# Altium PCB BRK7360.PcbDoc (part 1 of 3)
Units mil, origin at the board's own origin, x right, y up, seen from the top; angles counter-clockwise.
Board outline 7086.61 x 3956.69 mil, 4 copper layers (L1-Top, L2-Plane-1, L3-Plane-2, L4-Bottom), stack 61.722 mil thick; 106 components, 276 nets, 968 pads, 441 vias.
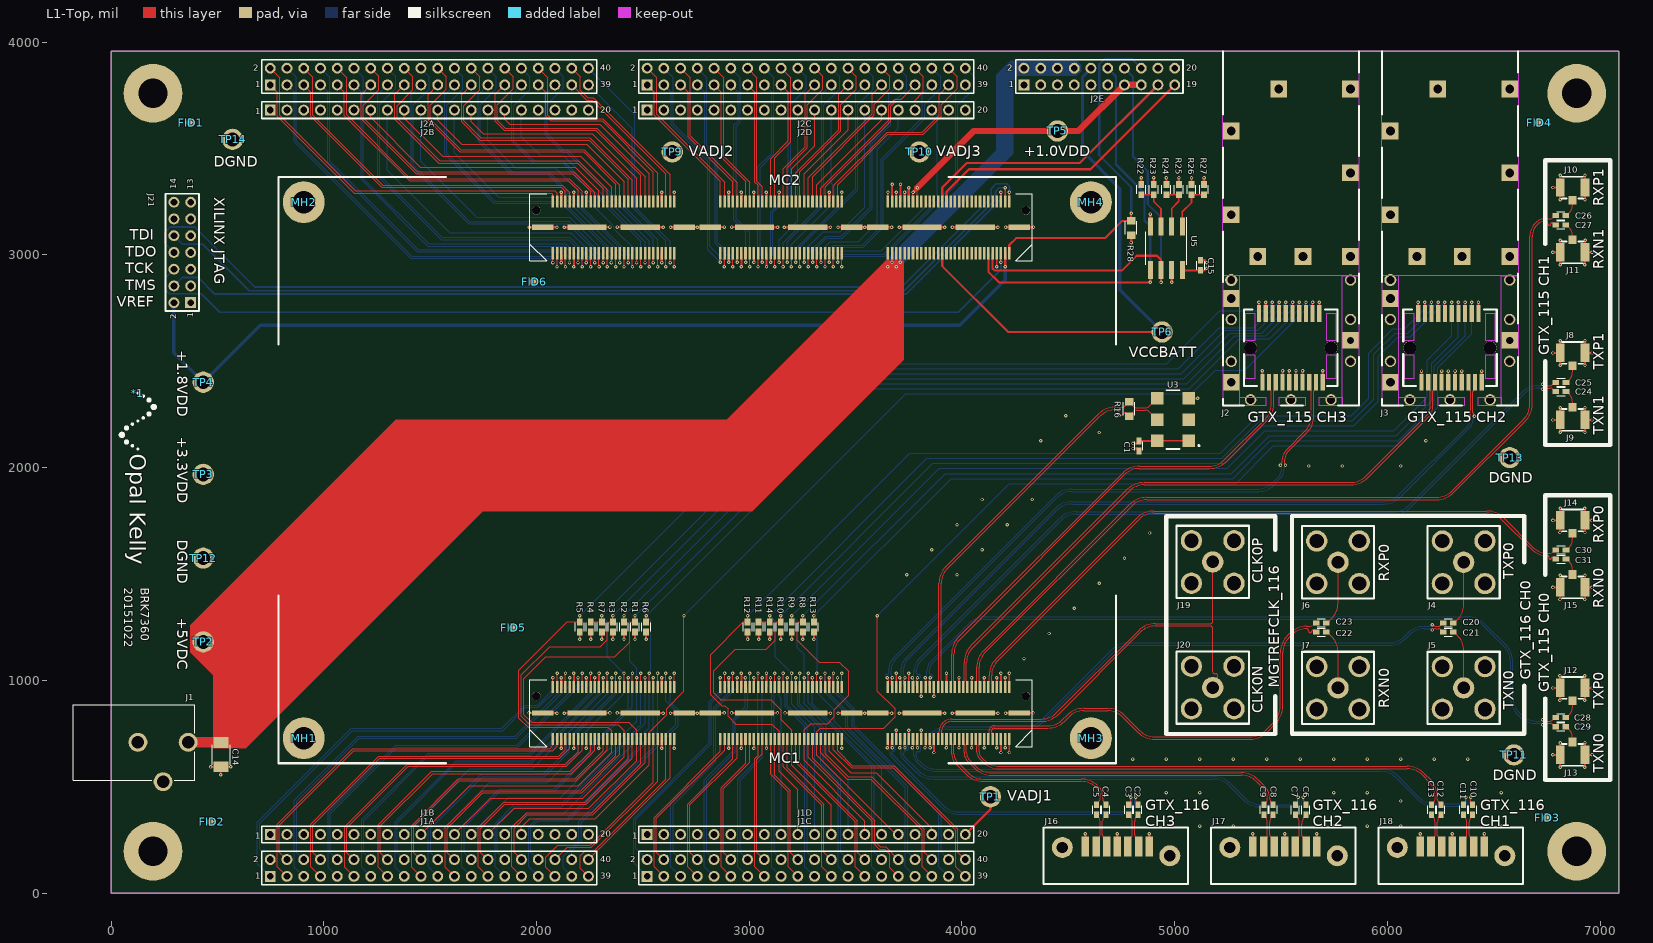
[diagram p0: L1-Top view]
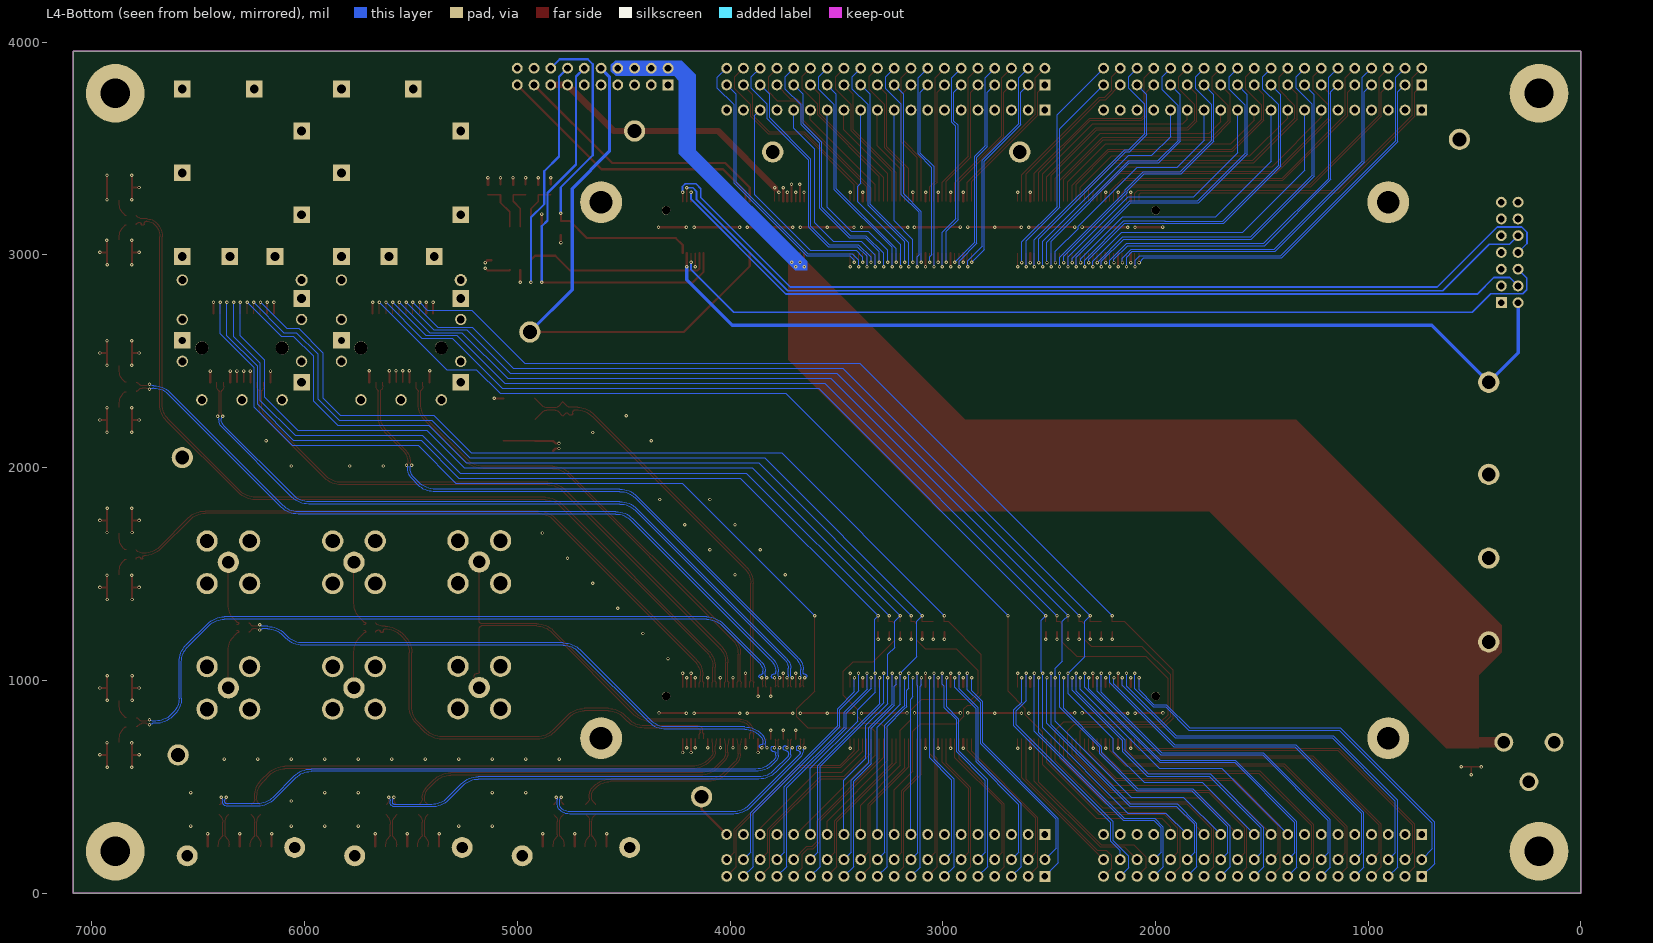
[diagram p1: L4-Bottom view, seen from below]
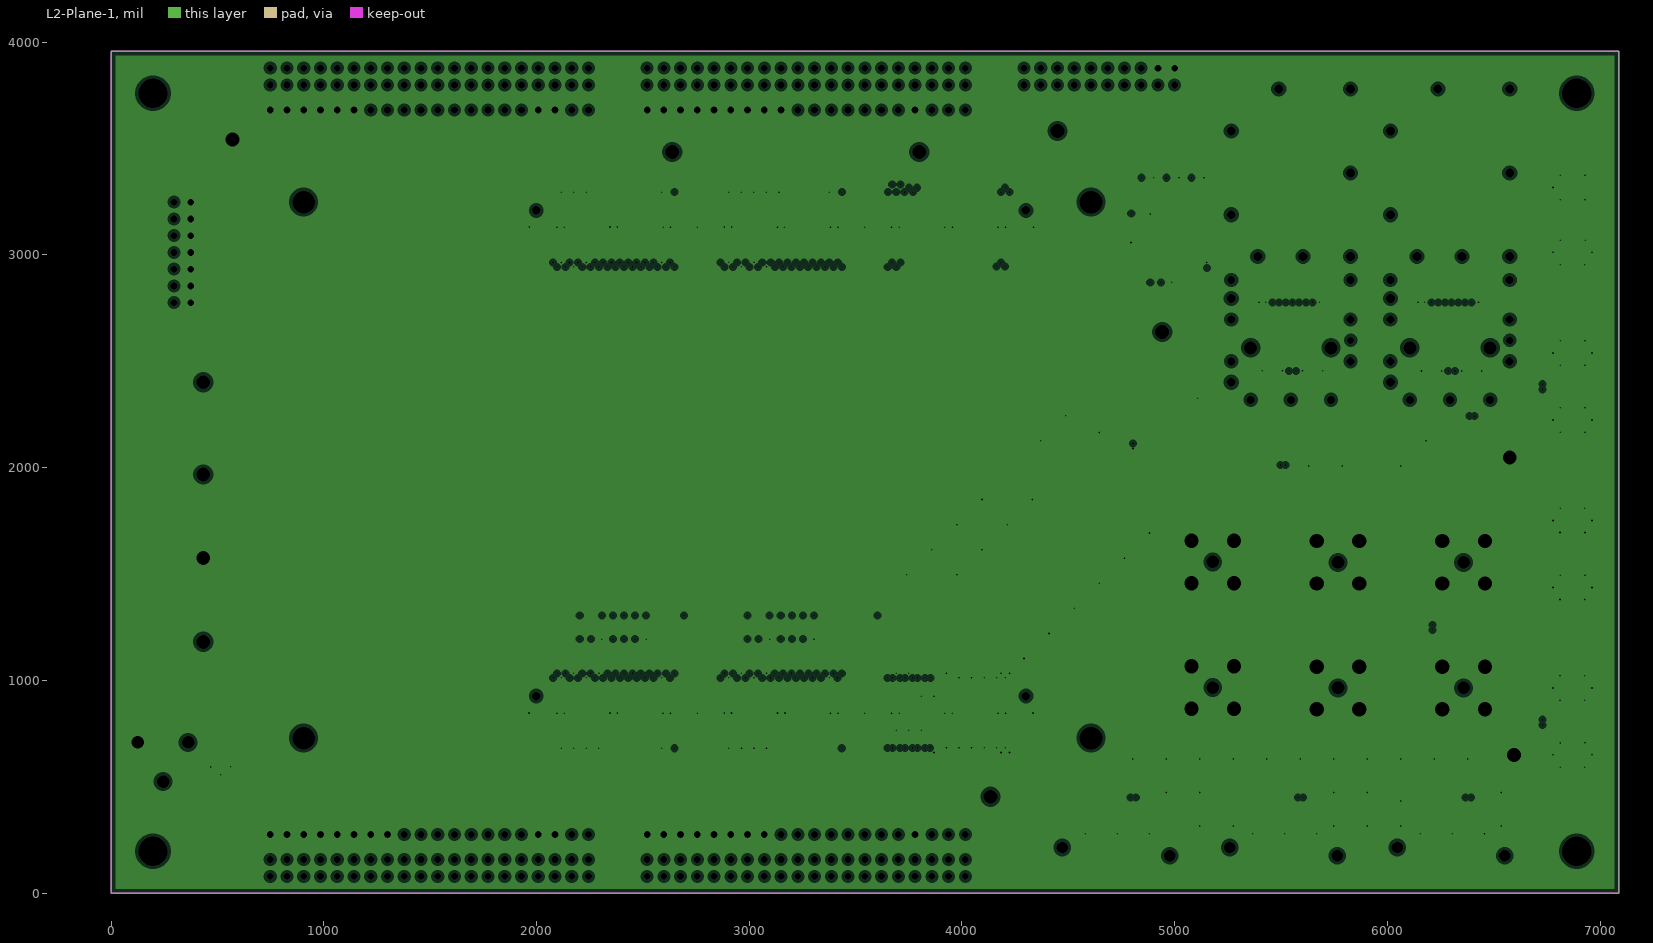
[diagram p2: L2-Plane-1, clearances drawn from the general rule]
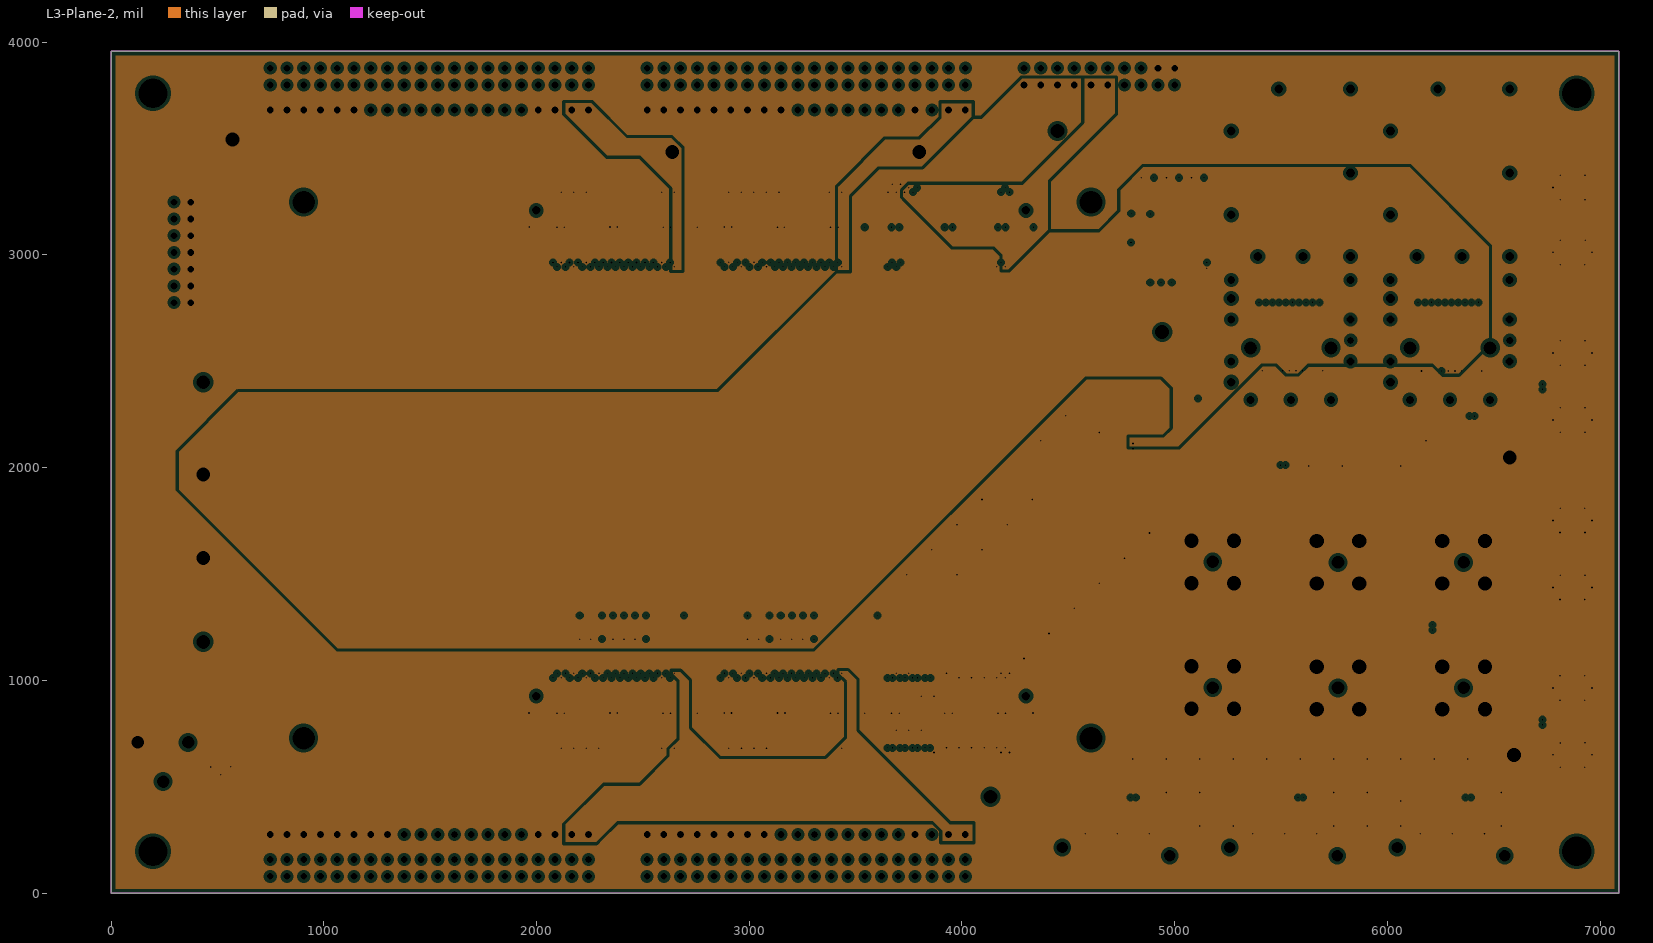
[diagram p3: L3-Plane-2, clearances drawn from the general rule]

## Layer stack, top to bottom
Top Solder: solder mask 0.4, Solder Resist, Dk 3.5
L1-Top: signal copper 1.95
Dielectric1: prepreg 2.268, FR-4, Dk 4.2
Dielectric 5: prepreg 2.268, FR-4, Dk 4.2
L2-Plane-1: plane copper 1.3, net DGND
Dielectric 4: core 14, Dk 4.2
Dielectric 6: core 6.05, Dk 4.2
Dielectric 7: core 6.05, Dk 4.2
Dielectric 8: core 6.05, Dk 4.2
Dielectric 9: core 14, Dk 4.2
L3-Plane-2: plane copper 1.3, net (Multiple Nets)
Dielectric3: prepreg 2.268, FR-4, Dk 4.2
Dielectric 10: prepreg 2.268, FR-4, Dk 4.2
L4-Bottom: signal copper 1.95
Bottom Solder: solder mask 0.4, Solder Resist, Dk 3.5

## Board outline
0,0 0,3956.69 7086.61,3956.69 7086.61,0

## Design rules (kind name [scope] priority, off if disabled: settings)
Clearance [All] p1: gap=5
DiffPairsRouting okxDiffRouting100ohm [All] p1: maxlimit=5.98 minlimit=5.98 mostfreqgap=5.98 toplayer_minwidth=5.24 toplayer_maxwidth=5.24 toplayer_prefwidth=5.24 bottomlayer_minwidth=5.24 bottomlayer_maxwidth=5.24 bottomlayer_prefwidth=5.24 maxuncoupledlength=500 // Differential pair spacing for all 100ohm diff routes based on NTI stackup.
FabricationTestPointUsage TestPointUsage [All] p1: valid=0 allowmultiple=FALSE
FabricationTestpoint Testpoint [All] p1: side=3 testpointundercomponent=TRUE minsize=40 maxsize=100 preferedsize=60 minholesize=0 maxholesize=40 preferedholesize=32 testpointgrid=1 allowsidetop=TRUE allowsidebottom=TRUE usegrid=TRUE gridtolerance=0.01
HoleSize [All] p1: absolutevalues=TRUE maxlimit=2160 minlimit=8 maxpercent=80.000 minpercent=20.000
MatchedLengths okMatchedMGTSFP1 [InDifferentialPairClass('okMGTDiffSFP1Match')] p1: tolerance=700 checknetsindiffpair=FALSE checkdiffpairvsdiffpair=TRUE checkothers=TRUE
MatchedLengths okMatchedMGTSFP0 [InDifferentialPairClass('okMGTDiffSFP0Match')] p2: tolerance=700 checknetsindiffpair=FALSE checkdiffpairvsdiffpair=TRUE checkothers=TRUE
MatchedLengths okMatchedMGTSATA2 [InDifferentialPairClass('okMGTDiffSATA2Match')] p3: tolerance=700 checknetsindiffpair=FALSE checkdiffpairvsdiffpair=TRUE checkothers=TRUE
MatchedLengths okMatchedMGTSATA1 [InDifferentialPairClass('okMGTDiffSATA1Match')] p4: tolerance=700 checknetsindiffpair=FALSE checkdiffpairvsdiffpair=TRUE checkothers=TRUE
MatchedLengths okMatchedMGTSATA0 [InDifferentialPairClass('okMGTDiffSATA0Match')] p5: tolerance=700 checknetsindiffpair=FALSE checkdiffpairvsdiffpair=TRUE checkothers=TRUE
MatchedLengths okMatchedMGTDiffPairs [InNetClass('okMGT')] p6: tolerance=5 checknetsindiffpair=TRUE checkdiffpairvsdiffpair=FALSE checkothers=FALSE
MatchedLengths okMatchedMGTRefClkDiffPairs [InNetClass('okMGTRefClk')] p7: tolerance=5 checknetsindiffpair=TRUE checkdiffpairvsdiffpair=FALSE checkothers=FALSE // Control skew within MGTREFCLKdiferential pairs.
MatchedLengths okMatchedMGTTX [InDifferentialPairClass('okMGTDiffTXMatch')] p8: tolerance=5000 checknetsindiffpair=TRUE checkdiffpairvsdiffpair=TRUE checkothers=TRUE
MatchedLengths okMatchedMGTRX [InDifferentialPairClass('okMGTDiffRXMatch')] p9: tolerance=5000 checknetsindiffpair=TRUE checkdiffpairvsdiffpair=TRUE checkothers=TRUE
PlaneClearance [All] p1: clearance=15
PlaneConnect [All] p1: planeconnectstyle=Direct reliefexpansion=20 reliefentries=4 reliefconductorwidth=10 reliefairgap=10
PolygonConnect "Via Connect" [IsVia] p1: connectstyle=Direct reliefconductorwidth=10 reliefentries=4 polygonreliefangle="90 Angle" airgapwidth=10
PolygonConnect [All] p2: connectstyle=Direct reliefconductorwidth=10 reliefentries=4 polygonreliefangle="90 Angle" airgapwidth=10
RoutingVias [All] p1: holewidth=8 width=16 viastyle="Through Hole" minholewidth=8 minwidth=16 maxholewidth=8 maxwidth=16
SilkToSolderMaskClearance SilkscreenOverComponentPads [IsPad] p1: minsilkscreentomaskgap=10 clearancetoexposedcopper=TRUE
SolderMaskExpansion [All] p1: expansion=4
Width [All] p1: maxlimit=50 minlimit=5 preferedwidth=10 minimp=50.000000 maximp=50.000000 favimp=50.000000
Width okxWidthDiff100ohm [(InDifferentialPairClass('All Differential Pairs'))] p2: maxlimit=9.5 minlimit=9.5 preferedwidth=9.5 minimp=50.000000 maximp=50.000000 favimp=50.000000 // 100 ohm differential pair routing based on 4 layer stackup from Saturn
Width okWidth50ohm [All] p3: maxlimit=40 minlimit=12 preferedwidth=12 minimp=50.000000 maximp=50.000000 favimp=50.000000 // 50 ohm SE routing based on 4 layer stackup from Saturn
23 further rules are at their usual default settings.

## Classes and differential pairs
component class Top: *1 FID1 FID2 FID3 FID4 FID5 FID6 MH1 MH2 MH3 MH4
component class MC2: C14 C15 J1 J2A J2B J2C J2D J2E J21 MC2 R22 R23 R24 R25 R26 R27 R28 TP2 TP3 TP4 TP5 TP6 TP9 TP10 TP11 TP12 TP13 TP14 U5
component class MC1: C1 C2 C3 C4 C5 C6 C7 C8 C9 C10 C11 C12 C13 C20 C21 C22 C23 C24 C25 C26 C27 C28 C29 C30 C31 J1A J1B J1C J1D J2 J3 J4 J5 J6 J7 J8 J9 J10 J11 J12 J13 J14 J15 J16 J17 J18 J19 J20 MC1 R1 R2 R3 R4 R5 R6 R7 R8 R9 R10 R11 R12 R13 R14 R16 TP1 U3
net class okMGTRefClk: GTX115_REFCLK0N GTX115_REFCLK0P GTX116_REFCLK0N GTX116_REFCLK0P
differential pair class okMGTDiffRXMatch: GTX115_RX0 GTX115_RX1 GTX115_RX2 GTX115_RX3 GTX116_RX0 GTX116_RX1 GTX116_RX2 GTX116_RX3
differential pair class okMGTDiffTXMatch: GTX115_TX0 GTX115_TX1 GTX115_TX2 GTX115_TX3 GTX116_TX0 GTX116_TX1 GTX116_TX2 GTX116_TX3
differential pair class okMGTDiffPairs: GTX115_REFCLK0 GTX115_RX0 GTX115_RX1 GTX115_RX2 GTX115_RX3 GTX115_TX0 GTX115_TX1 GTX115_TX2 GTX115_TX3 GTX116_REFCLK0 GTX116_RX0 GTX116_RX1 GTX116_RX1_C GTX116_RX2 GTX116_RX2_C GTX116_RX3 GTX116_RX3_C GTX116_TX0 GTX116_TX1 GTX116_TX1_C GTX116_TX2 GTX116_TX2_C GTX116_TX3 GTX116_TX3_C
net class okMGT: GTX115_REFCLK0N GTX115_REFCLK0P GTX115_RXN0 GTX115_RXN1 GTX115_RXN2 GTX115_RXN3 GTX115_RXP0 GTX115_RXP1 GTX115_RXP2 GTX115_RXP3 GTX115_TXN0 GTX115_TXN1 GTX115_TXN2 GTX115_TXN3 GTX115_TXP0 GTX115_TXP1 GTX115_TXP2 GTX115_TXP3 GTX116_REFCLK0N GTX116_REFCLK0P GTX116_RXN0 GTX116_RXN1 GTX116_RXN1_C GTX116_RXN2 GTX116_RXN2_C GTX116_RXN3 GTX116_RXN3_C GTX116_RXP0 GTX116_RXP1 GTX116_RXP1_C GTX116_RXP2 GTX116_RXP2_C GTX116_RXP3 GTX116_RXP3_C GTX116_TXN0 GTX116_TXN1 GTX116_TXN1_C GTX116_TXN2 GTX116_TXN2_C GTX116_TXN3 GTX116_TXN3_C GTX116_TXP0 GTX116_TXP1 GTX116_TXP1_C GTX116_TXP2 GTX116_TXP2_C GTX116_TXP3 GTX116_TXP3_C
differential pair class okMGTDiffSFP0Match: GTX115_RX3 GTX115_TX3
differential pair class okMGTDiffSFP1Match: GTX115_RX2 GTX115_TX2
differential pair class okMGTDiffSATA0Match: GTX116_RX1 GTX116_TX1
differential pair class okMGTDiffSATA1Match: GTX116_RX2 GTX116_TX2
differential pair class okMGTDiffSATA2Match: GTX116_RX3 GTX116_TX3
differential pair GTX116_TX3_C: +GTX116_TXP3_C -GTX116_TXN3_C
differential pair GTX116_TX2_C: +GTX116_TXP2_C -GTX116_TXN2_C
differential pair GTX116_TX1_C: +GTX116_TXP1_C -GTX116_TXN1_C
differential pair GTX116_RX3_C: +GTX116_RXP3_C -GTX116_RXN3_C
differential pair GTX116_RX2_C: +GTX116_RXP2_C -GTX116_RXN2_C
differential pair GTX116_RX1_C: +GTX116_RXP1_C -GTX116_RXN1_C
differential pair GTX116_TX3: +GTX116_TXP3 -GTX116_TXN3
differential pair GTX116_TX2: +GTX116_TXP2 -GTX116_TXN2
differential pair GTX116_TX1: +GTX116_TXP1 -GTX116_TXN1
differential pair GTX116_TX0: +GTX116_TXP0 -GTX116_TXN0
differential pair GTX116_RX3: +GTX116_RXP3 -GTX116_RXN3
differential pair GTX116_RX2: +GTX116_RXP2 -GTX116_RXN2
differential pair GTX116_RX1: +GTX116_RXP1 -GTX116_RXN1
differential pair GTX116_RX0: +GTX116_RXP0 -GTX116_RXN0
differential pair GTX115_TX3: +GTX115_TXP3 -GTX115_TXN3
differential pair GTX115_TX2: +GTX115_TXP2 -GTX115_TXN2
differential pair GTX115_TX1: +GTX115_TXP1 -GTX115_TXN1
differential pair GTX115_TX0: +GTX115_TXP0 -GTX115_TXN0
differential pair GTX115_RX3: +GTX115_RXP3 -GTX115_RXN3
differential pair GTX115_RX2: +GTX115_RXP2 -GTX115_RXN2
differential pair GTX115_RX1: +GTX115_RXP1 -GTX115_RXN1
differential pair GTX115_RX0: +GTX115_RXP0 -GTX115_RXN0
differential pair GTX115_REFCLK0: +GTX115_REFCLK0P -GTX115_REFCLK0N
differential pair GTX116_REFCLK0: +GTX116_REFCLK0P -GTX116_REFCLK0N

## Components (designator, comment, footprint, x,y, rotation, side; value= is the part's Value field where it differs from the comment)
*1 "Opal Kelly Logo" okLogo-23x5 125.6,2350.8 r270 top
C1 "C0402C103K4RACTU" CAPC1005N 4832,2102 r90 top
C2 "C0402C104K8PACTU" CAPC1005N 4827,392 r90 top
C3 "C0402C104K8PACTU" CAPC1005N 4784,392 r90 top
C4 "C0402C104K8PACTU" CAPC1005N 4676,392 r90 top
C5 "C0402C104K8PACTU" CAPC1005N 4633,392 r90 top
C6 "C0402C104K8PACTU" CAPC1005N 5617,391.38 r90 top
C7 "C0402C104K8PACTU" CAPC1005N 5567,391.38 r90 top
C8 "C0402C104K8PACTU" CAPC1005N 5463,392 r90 top
C9 "C0402C104K8PACTU" CAPC1005N 5420,392 r90 top
C10 "C0402C104K8PACTU" CAPC1005N 6401,392 r90 top
C11 "C0402C104K8PACTU" CAPC1005N 6358,392 r90 top
C12 "C0402C104K8PACTU" CAPC1005N 6251,392 r90 top
C13 "C0402C104K8PACTU" CAPC1005N 6208,392 r90 top
C14 "JMK316BJ476ML-T" CAPC3216N 516,651 r270 top
C15 "C0402C104K8PACTU" CAPC1005N 5122,2951 r90 top
C20 "C0402C104K8PACTU" CAPC1005N 6286,1270 r180 top
C21 "C0402C104K8PACTU" CAPC1005N 6286,1227 r180 top
C22 "C0402C104K8PACTU" CAPC1005N 5688.98,1270 r180 top
C23 "C0402C104K8PACTU" CAPC1005N 5688.98,1227 r180 top
C24 "C0402C104K8PACTU" CAPC1005N 6815.62,2401 r180 top
C25 "C0402C104K8PACTU" CAPC1005N 6815.62,2358 r180 top
C26 "C0402C104K8PACTU" CAPC1005N 6814.96,3185.04 r180 top
C27 "C0402C104K8PACTU" CAPC1005N 6814.96,3141.73 r180 top
C28 "C0402C104K8PACTU" CAPC1005N 6815,825 r180 top
C29 "C0402C104K8PACTU" CAPC1005N 6815,782 r180 top
C30 "C0402C104K8PACTU" CAPC1005N 6815.62,1613 r180 top
C31 "C0402C104K8PACTU" CAPC1005N 6815.62,1570 r180 top
FID1 "FIDUCIAL" FID1MM/2MM-SS 374.02,3622.05 r90 top
FID2 "FIDUCIAL" FID1MM/2MM-SS 472.44,334.65 r90 top
FID3 "FIDUCIAL" FID1MM/2MM-SS 6751.97,354.33 r90 top
FID4 "FIDUCIAL" FID1MM/2MM-SS 6712.6,3622.05 r90 top
FID5 "FIDUCIAL" FID1MM/2MM-SS 1891,1247 r90 top
FID6 "FIDUCIAL" FID1MM/2MM-SS 1988.19,2874.02 r90 top
J1 "PJ-102AH" CUI-PJ102A -177.17,708.66 r270 top
J1A "0877584016" HDR2X20-2MM 1496.06,118.11 r0 top
J1B "Header, 20-Pin, Single Row" HDR1X20-2MM 1496.06,275.59 r0 top
J1C "0877584016" HDR2X20-2MM 3267.72,118.11 r0 top
J1D "Header, 20-Pin, Single Row" HDR1X20-2MM 3267.72,275.59 r0 top
J2 "UE75-A20-6000T" SFP_RCPT_20_CAGE 5826.77,2598.43 r270 top locked
J2A "0877584016" HDR2X20-2MM 1496.06,3838.58 r0 top
J2B "Header, 20-Pin, Single Row" HDR1X20-2MM 1496.06,3681.1 r0 top
J2C "0877584016" HDR2X20-2MM 3267.72,3838.58 r0 top
J2D "Header, 20-Pin, Single Row" HDR1X20-2MM 3267.72,3681.1 r0 top
J2E "0877582016" HDR2X10-2MM 4645.67,3838.58 r0 top
J3 "UE75-A20-6000T" SFP_RCPT_20_CAGE 6574.8,2598.43 r270 top locked
J4 "TXP0" SMA 6358.27,1555.12 r270 top locked
J5 "TXN0" SMA 6358.27,964.57 r270 top locked
J6 "RXP0" SMA 5767.72,1555.12 r270 top locked
J7 "RXN0" SMA 5767.72,964.57 r270 top locked
J8 "TXP1" UFL-R-SMT-1 6870.08,2539.37 r0 top locked
J9 "TXN1" UFL-R-SMT-1 6870.08,2224.41 r180 top locked
J10 "RXP1" UFL-R-SMT-1 6870.08,3316.93 r0 top locked
J11 "RXN1" UFL-R-SMT-1 6870.08,3011.81 r180 top locked
J12 "TXP0" UFL-R-SMT-1 6870.08,964.57 r0 top locked
J13 "TXN0" UFL-R-SMT-1 6870.08,649.61 r180 top locked
J14 "RXP0" UFL-R-SMT-1 6870.08,1751.97 r0 top locked
J15 "RXN0" UFL-R-SMT-1 6870.08,1437.01 r180 top locked
J16 "67800-5005" MOLEX-67800-5005 4724.41,196.85 r0 top locked
J17 "67800-5005" MOLEX-67800-5005 5511.81,196.85 r0 top locked
J18 "67800-5005" MOLEX-67800-5005 6299.21,196.85 r0 top locked
J19 "901-144-8RFX" SMA 5178.74,1556.69 r270 top locked
J20 "901-144-8RFX" SMA 5178.74,966.14 r270 top locked
J21 "87831-1420" HDR2X7-2MM 334.65,3011.81 r90 top
MC1 "QTH-090-01-F-D-A" QTH-090-01-X-D 3149.61,846.46 r0 top locked
MC2 "QTH-090-01-F-D-A" QTH-090-01-X-D 3149.61,3129.92 r0 top
MH1 "MTG" MTG-2.7/5.0-PTH 905.51,728.35 r0 top
MH2 "MTG" MTG-2.7/5.0-PTH 905.51,3248.03 r0 top
MH3 "MTG" MTG-2.7/5.0-PTH 4606.3,728.35 r0 top
MH4 "MTG" MTG-2.7/5.0-PTH 4606.3,3248.03 r0 top
R1 "CRCW04024K70JNED" RESC1005N 2463,1251 r270 top
R2 "CRCW04024K70JNED" RESC1005N 2411,1251 r270 top
R3 "CRCW04024K70JNED" RESC1005N 2359,1251 r270 top
R4 "CRCW04024K70JNED" RESC1005N 2255,1251 r270 top
R5 "CRCW04024K70JNED" RESC1005N 2203,1251 r270 top
R6 "CRCW04024K70JNED" RESC1005N 2515,1251 r270 top
R7 "CRCW04024K70JNED" RESC1005N 2307,1251 r270 top
R8 "CRCW04024K70JNED" RESC1005N 3252,1251 r90 top
R9 "CRCW04024K70JNED" RESC1005N 3200,1251 r90 top
R10 "CRCW04024K70JNED" RESC1005N 3148,1251 r90 top
R11 "CRCW04024K70JNED" RESC1005N 3044,1251 r90 top
R12 "CRCW04024K70JNED" RESC1005N 2992,1251 r90 top
R13 "CRCW04024K70JNED" RESC1005N 3304,1251 r270 top
R14 "CRCW04024K70JNED" RESC1005N 3096,1251 r270 top
R16 "CRCW0603100RFKEA" RESC1608N 4786,2276 r90 top
R22 "CRCW04020000Z0ED" RESC1005N 4842.52,3307.09 r270 top
R23 "CRCW04020000Z0ED" RESC1005N 4901.57,3307.09 r90 top
R24 "CRCW04020000Z0ED" RESC1005N 4960.63,3307.09 r270 top
R25 "CRCW04020000Z0ED" RESC1005N 5019.69,3307.09 r90 top
R26 "CRCW04020000Z0ED" RESC1005N 5078.74,3307.09 r270 top
R27 "CRCW04020000Z0ED" RESC1005N 5137.8,3307.09 r90 top
R28 "CRCW06030000Z0EA" RESC1608N 4795,3126.54 r90 top
TP1 "VADJ1" TP_MED 4133.86,452.76 r0 top
TP2 "+5VDC" TP_MED 433.07,1181.1 r0 top
TP3 "+3.3VDD" TP_MED 433.07,1968.5 r0 top
TP4 "+1.8VDD" TP_MED 433.07,2401.57 r0 top
TP5 "+1.0VDD" TP_MED 4448.82,3582.68 r0 top
TP6 "VCCBATT" TP_MED 4940.94,2637.8 r0 top
TP9 "VADJ2" TP_MED 2637.8,3484.25 r0 top
TP10 "VADJ3" TP_MED 3799.21,3484.25 r90 top
TP11 "DGND" TP_MED 6594.49,649.61 r90 top
TP12 "DGND" TP_MED 433.07,1574.8 r90 top
TP13 "DGND" TP_MED 6574.8,2047.24 r90 top
TP14 "DGND" TP_MED 570.87,3543.31 r90 top
U3 "BF-100.000MBE-T" OSC_SMD6_5X7 4991.43,2225.95 r90 top
U5 "24LC64-I/SN" SO-G8 4960.63,3031.5 r180 top

## Footprints (in the part's own frame and the unit in brackets; to place one, negate y for a bottom-side part, rotate by r counter-clockwise, add the part's x,y. Pads: shape width x height; smd on the part's side, far side on the other; paste and mask are expansions set on the pad)
CAPC1005N [mm] "Chip Capacitor, Body 1.0x0.5mm, IPC Medium Density"
  rect 0.8x0.6 smd: 1(-0.6,0) 2(0.6,0)
  silkscreen extent -0.5,-0.48 0.5,0.48, body extent -0.55,-0.3 0.55,0.3, height 0.6
CAPC3216N [mm] "Chip Capacitor, Body 3.2x1.6mm, IPC Medium Density"
  rect 1.3x1.8 smd: 1(-1.45,0) 2(1.45,0)
  silkscreen extent -1.2,-1.08 1.2,1.08, body extent -1.7,-0.9 1.7,0.9, height 1.35
CUI-PJ102A [mm] "2.1mm/5.5mm DC power jack"
  round 2.25 hole 1.5: 1(0,13.7) 2(0,7.7) 3(4.7,10.7)
  silkscreen extent -4.5,0 4.5,14.5
FID1MM/2MM-SS [mm] "Fiducial 1mm copper, 2mm soldermask, single-side"
  round 1 smd paste-0.5 mask+0.5: FID?(0,0)
HDR1X20-2MM [mm] "2mm 1x20 Header"
  rect 1.3x1.3 hole 0.8: 1(-19,0)
  round 1.3 hole 0.8: 2(-17,0) 3(-15,0) 4(-13,0) 5(-11,0) 6(-9,0) 7(-7,0) 8(-5,0) 9(-3,0) 10(-1,0) 11(1,0) 12(3,0) 13(5,0) 14(7,0) 15(9,0) 16(11,0) 17(13,0) 18(15,0) 19(17,0) 20(19,0)
  silkscreen extent -20,-1 20,1
HDR2X7-2MM [mm] "2mm 2x7 header"
  rect 1.3x1.3 hole 0.8: 1(-6,-1)
  round 1.3 hole 0.8: 2(-6,1) 3(-4,-1) 4(-4,1) 5(-2,-1) 6(-2,1) 7(0,-1) 8(0,1) 9(2,-1) 10(2,1) 11(4,-1) 12(4,1) 13(6,-1) 14(6,1)
  silkscreen extent -7,-2 7,2
HDR2X10-2MM [mm] "2mm 2x10 header"
  rect 1.3x1.3 hole 0.8: 1(-9,-1)
  round 1.3 hole 0.8: 2(-9,1) 3(-7,-1) 4(-7,1) 5(-5,-1) 6(-5,1) 7(-3,-1) 8(-3,1) 9(-1,-1) 10(-1,1) 11(1,-1) 12(1,1) 13(3,-1) 14(3,1) 15(5,-1) 16(5,1) 17(7,-1) 18(7,1) 19(9,-1) 20(9,1)
  silkscreen extent -10,-2 10,2
HDR2X20-2MM [mm] "2mm 2x20 header"
  rect 1.3x1.3 hole 0.8: 1(-19,-1)
  round 1.3 hole 0.8: 2(-19,1) 3(-17,-1) 4(-17,1) 5(-15,-1) 6(-15,1) 7(-13,-1) 8(-13,1) 9(-11,-1) 10(-11,1) 11(-9,-1) 12(-9,1) 13(-7,-1) 14(-7,1) 15(-5,-1) 16(-5,1) 17(-3,-1) 18(-3,1) 19(-1,-1) 20(-1,1) 21(1,-1) 22(1,1) 23(3,-1) 24(3,1) 25(5,-1) 26(5,1) 27(7,-1) 28(7,1) 29(9,-1) 30(9,1) 31(11,-1) 32(11,1) 33(13,-1) 34(13,1) 35(15,-1) 36(15,1) 37(17,-1) 38(17,1) 39(19,-1) 40(19,1)
  silkscreen extent -20,-2 20,2
MOLEX-67800-5005 [mm]
  rect 0.9x2.4 smd: 1(3.955,0.55) 2(2.685,0.55) 3(1.415,0.55) 4(0.145,0.55) 5(-1.125,0.55) 6(-2.395,0.55) 7(-3.665,0.55)
  round 2.5 hole 1.35: MH(-6.415,0.45) MH(6.415,-0.55)
  silkscreen extent -8.65,-3.9 8.6,2.85
MTG-2.7/5.0-PTH [mm] "Mounting hole, 2.7mm ID, 5.0mm OD, plated"
  round 5 / inner round 3.175 / far side round 5 hole 2.7: 1(0,0)
okLogo-23x5 [mil] "Opal Kelly silkscreen logo (23mm x 5mm)"
  silkscreen extent -3,-82 266,83
OSC_SMD6_5X7 [mm] "5x7mm SMD clock oscillator"
  rect 1.5x1.5 smd: 1(-2.54,-1.875) 2(0,-1.875) 3(2.54,-1.875) 4(2.54,1.875) 5(0,1.875) 6(-2.54,1.875)
  silkscreen extent -3.5,-3.2 3.5,0.8
QTH-090-01-X-D [mm]
  rect 2.54x0.64 smd: 0(-28.445,0) 0(-11.555,0) 0(-8.445,0) 0(8.445,0) 0(11.555,0) 0(28.445,0)
  rect 4.7x0.64 smd: 0(-23.175,0) 0(-16.825,0) 0(-3.175,0) 0(3.175,0) 0(16.825,0) 0(23.175,0)
  rect 0.3x1.45 smd: 1(-27.25,3.09) 2(-27.25,-3.09) 3(-26.75,3.09) 4(-26.75,-3.09) 5(-26.25,3.09) 6(-26.25,-3.09) 7(-25.75,3.09) 8(-25.75,-3.09) 9(-25.25,3.09) 10(-25.25,-3.09) 11(-24.75,3.09) 12(-24.75,-3.09) 13(-24.25,3.09) 14(-24.25,-3.09) 15(-23.75,3.09) 16(-23.75,-3.09) 17(-23.25,3.09) 18(-23.25,-3.09) 19(-22.75,3.09) 20(-22.75,-3.09) 21(-22.25,3.09) 22(-22.25,-3.09) 23(-21.75,3.09) 24(-21.75,-3.09) 25(-21.25,3.09) 26(-21.25,-3.09) 27(-20.75,3.09) 28(-20.75,-3.09) 29(-20.25,3.09) 30(-20.25,-3.09) 31(-19.75,3.09) 32(-19.75,-3.09) 33(-19.25,3.09) 34(-19.25,-3.09) 35(-18.75,3.09) 36(-18.75,-3.09) 37(-18.25,3.09) 38(-18.25,-3.09) 39(-17.75,3.09) 40(-17.75,-3.09) 41(-17.25,3.09) 42(-17.25,-3.09) 43(-16.75,3.09) 44(-16.75,-3.09) 45(-16.25,3.09) 46(-16.25,-3.09) 47(-15.75,3.09) 48(-15.75,-3.09) 49(-15.25,3.09) 50(-15.25,-3.09) 51(-14.75,3.09) 52(-14.75,-3.09) 53(-14.25,3.09) 54(-14.25,-3.09) 55(-13.75,3.09) 56(-13.75,-3.09) 57(-13.25,3.09) 58(-13.25,-3.09) 59(-12.75,3.09) 60(-12.75,-3.09) 61(-7.25,3.09) 62(-7.25,-3.09) 63(-6.75,3.09) 64(-6.75,-3.09) 65(-6.25,3.09) 66(-6.25,-3.09) 67(-5.75,3.09) 68(-5.75,-3.09) 69(-5.25,3.09) 70(-5.25,-3.09) 71(-4.75,3.09) 72(-4.75,-3.09) 73(-4.25,3.09) 74(-4.25,-3.09) 75(-3.75,3.09) 76(-3.75,-3.09) 77(-3.25,3.09) 78(-3.25,-3.09) 79(-2.75,3.09) 80(-2.75,-3.09) 81(-2.25,3.09) 82(-2.25,-3.09) 83(-1.75,3.09) 84(-1.75,-3.09) 85(-1.25,3.09) 86(-1.25,-3.09) 87(-0.75,3.09) 88(-0.75,-3.09) 89(-0.25,3.09) 90(-0.25,-3.09) 91(0.25,3.09) 92(0.25,-3.09) 93(0.75,3.09) 94(0.75,-3.09) 95(1.25,3.09) 96(1.25,-3.09) 97(1.75,3.09) 98(1.75,-3.09) 99(2.25,3.09) 100(2.25,-3.09) 101(2.75,3.09) 102(2.75,-3.09) 103(3.25,3.09) 104(3.25,-3.09) 105(3.75,3.09) 106(3.75,-3.09) 107(4.25,3.09) 108(4.25,-3.09) 109(4.75,3.09) 110(4.75,-3.09) 111(5.25,3.09) 112(5.25,-3.09) 113(5.75,3.09) 114(5.75,-3.09) 115(6.25,3.09) 116(6.25,-3.09) 117(6.75,3.09) 118(6.75,-3.09) 119(7.25,3.09) 120(7.25,-3.09) 121(12.75,3.09) 122(12.75,-3.09) 123(13.25,3.09) 124(13.25,-3.09) 125(13.75,3.09) 126(13.75,-3.09) 127(14.25,3.09) 128(14.25,-3.09) 129(14.75,3.09) 130(14.75,-3.09) 131(15.25,3.09) 132(15.25,-3.09) 133(15.75,3.09) 134(15.75,-3.09) 135(16.25,3.09) 136(16.25,-3.09) 137(16.75,3.09) 138(16.75,-3.09) 139(17.25,3.09) 140(17.25,-3.09) 141(17.75,3.09) 142(17.75,-3.09) 143(18.25,3.09) 144(18.25,-3.09) 145(18.75,3.09) 146(18.75,-3.09) 147(19.25,3.09) 148(19.25,-3.09) 149(19.75,3.09) 150(19.75,-3.09) 151(20.25,3.09) 152(20.25,-3.09) 153(20.75,3.09) 154(20.75,-3.09) 155(21.25,3.09) 156(21.25,-3.09) 157(21.75,3.09) 158(21.75,-3.09) 159(22.25,3.09) 160(22.25,-3.09) 161(22.75,3.09) 162(22.75,-3.09) 163(23.25,3.09) 164(23.25,-3.09) 165(23.75,3.09) 166(23.75,-3.09) 167(24.25,3.09) 168(24.25,-3.09) 169(24.75,3.09) 170(24.75,-3.09) 171(25.25,3.09) 172(25.25,-3.09) 173(25.75,3.09) 174(25.75,-3.09) 175(26.25,3.09) 176(26.25,-3.09) 177(26.75,3.09) 178(26.75,-3.09) 179(27.25,3.09) 180(27.25,-3.09)
  round 1.02 hole 1.02 unplated: MH(-29.24,2.03) MH(29.24,2.03)
  silkscreen extent -30,-4 30,4
RESC1005N [mm] "Chip Resistor, Body 1.1x0.5mm, IPC Medium Density"
  rect 0.8x0.7 smd: 1(-0.6,0) 2(0.6,0)
  silkscreen extent -0.5,-0.53 0.5,0.53, body extent -0.55,-0.3 0.55,0.3, height 0.4
RESC1608N [mm] "Chip Resistor, Body 1.6x0.8mm, IPC Medium Density"
  rect 0.9x1 smd: 1(-0.85,0) 2(0.85,0)
  silkscreen extent -0.77,-0.68 0.78,0.68, body extent -0.85,-0.48 0.85,0.48, height 0.6
SFP_RCPT_20_CAGE [mm]
  rect 2x2 hole 1.05: 0(-30,-8.58) 0(-30,0) 0(-25,-14.25) 0(-20,0) 0(-15,-14.25) 0(-10,0) 0(-10,-11.08) 0(-10,-5.68) 0(-5,-14.25) 0(5,-14.25)
  round 1.35 hole 0.95: 0(-7.2,0) 0(-2.5,0) 0(-2.5,-14.25) 0(2.5,0) 0(2.5,-14.25) 0(7.1,-2.33) 0(7.1,-7.13) 0(7.1,-11.93)
  round 1.45 hole 0.95: 0(-7.2,-14.25)
  rect 2x2 hole 0.85: 0(0,0)
  rect 2x0.5 smd: 1(-3.2,-3.73) 2(-3.2,-4.53) 3(-3.2,-5.33) 4(-3.2,-6.13) 5(-3.2,-6.93) 6(-3.2,-7.73) 7(-3.2,-8.53) 8(-3.2,-9.33) 9(-3.2,-10.13) 10(-3.2,-10.93) 11(5,-10.53) 12(5,-9.73) 13(5,-8.93) 14(5,-8.13) 15(5,-7.33) 16(5,-6.53) 17(5,-5.73) 18(5,-4.93) 19(5,-4.13) 20(5,-3.33)
  round 1.55 hole 1.55 unplated: MH(0.9,-2.33) MH(0.9,-11.93)
  L1-Top keep-out region: -3.2,-2.9 0,-2.9 0,-1.7 -3.2,-1.7
  L1-Top keep-out region: 1.8,-2.9 4.5,-2.9 4.5,-1.7 1.8,-1.7
  L1-Top keep-out region: 1.8,-12.6 4.5,-12.6 4.5,-11.4 1.8,-11.4
  L1-Top keep-out region: -3.2,-12.6 0,-12.6 0,-11.4 -3.2,-11.4
  L1-Top keep-out region: 7.8,-8.525 6.8,-8.525 6.8,-5.4 7.8,-5.4
  L1-Top keep-out region: -34.5,1 -7.7,1 -7.7,-15.25 -34.5,-15.25
  L1-Top keep-out region: -7.7,-15.25 7.8,-15.25 7.8,-13.25 -7.7,-13.25
  L1-Top keep-out region: -7.7,1 7.8,1 7.8,-1 -7.7,-1
  L1-Top keep-out region: 7.8,-13.25 6.8,-13.25 6.8,-10.125 7.8,-10.125
  L1-Top keep-out region: 7.8,-3.75 6.8,-3.75 6.8,-1 7.8,-1
  silkscreen extent -34.5,-15.25 7.8,1
SMA [mil] "PCB-mount SMA connector"
  round 100 hole 59: 1(0,0)
  round 100 hole 67: 2(-100,100) 2(-100,-100) 2(100,100) 2(100,-100)
  Top Overlay keep-out lines w10: 170,-170 -170,-170 -170,170 170,170 170,-170
  silkscreen extent -170,-170 170,170
SO-G8 [mm] "Small Outline; 8 Leads; Body Width 3.9 mm; Pitch 1.27 mm"
  rect 0.6x2.2 smd: 1(-1.905,-2.6) 2(-0.635,-2.6) 3(0.635,-2.6) 4(1.905,-2.6) 5(1.905,2.6) 6(0.635,2.6) 7(-0.635,2.6) 8(-1.905,2.6)
  silkscreen extent -2.45,-3.7 2.45,1.95
TP_MED [mil] "Testpoint - medium sized"
  round 100 hole 65: 1(0,0)
UFL-R-SMT-1 [mm] "U.FL surface-mount coaxial connector"
  rect 1x1.05 smd paste-2: 1(0,-1.525)
  rect 1.05x2.2 smd paste-2: 2(-1.475,0) 2(1.475,0)
  silkscreen extent -1.3,-1.3 1.3,1.3

## Part data
*1: library part OKLOGO
C1: library part 000295, "Ceramic Capacitor"
C2 C3 C4 C5 C6 C7 C8 C9 C10 C11 C12 C13 C15 C20 C21 C22 C23 C24 C25 C26 C27 C28 C29 C30 C31: library part 000070, "Ceramic capacitor"
C14: library part 000570, "Ceramic Capacitor"
FID1 FID2 FID3 FID4 FID5 FID6: "PCB fiducial"
J1: library part 000356, "DC power connector - high current"
J1A J1C J2A J2C: library part 000583, "2mm header, 20x2, thru-hole"
J1B J1D J2B J2D: library part 001334, "2mm header, 20x1, thru-hole"
J2 J3: library part 000986, "SFP 20-POS Recepticle"
J2E: library part 001338, "2mm header, 10x2, thru-hole"
J4 J5 J6 J7 J19 J20: library part 000974, "Straight SMA PCB Mount"
J8 J9 J10 J11 J12 J13 J14 J15: library part 001335, "U.FL surface-mount coaxial connector"
J16 J17 J18: library part 000988, "SATA 7-pin receptacle"
J21: library part 000541, "2mm header, shrouded"
MC1 MC2: library part 000876, "0.5mm hi-speed, high-density header (Female)"
MH1 MH2 MH3 MH4: "Mounting hole"
R1 R2 R3 R4 R5 R6 R7 R8 R9 R10 R11 R12 R13 R14: library part 000754, "Thick-film resistor"
R16: library part 000789, "Thick-film resistor"
R22 R23 R24 R25 R26 R27: library part 000755, "Thick-film resistor"
R28: library part 000411, "Zero-ohm resistor"
TP1 TP2 TP3 TP4 TP5 TP6 TP9 TP10 TP11 TP12 TP13 TP14: library part 000265, "Testpoint"
U3: library part 000846, "100 MHz LVDS oscillator"
U5: library part 000004, "EEPROM"

## Free pads (board coordinates)
  round 275.59 hole 137.8: MH(196.85,196.85) MH(196.85,3759.84) MH(6889.76,196.85) MH(6889.76,3759.84)

## Via types
v1: diameter 16, hole 8, L1-Top to L4-Bottom, tented both sides, 441 vias

## Nets (pads, with @x,y where several pads share a name; then routed paths per layer and width w, separated by ;. In a path a pad name is that pad's centre, name@x,y a point inside that pad or via, vN(x,y) a via of type N, cw(c..) or ccw(c..) an arc to the next point about the centre after c; other vN are vias at no path point)
+1.0VDD: J2E.13 J2E.15 MC2.133 MC2.135 TP5.1 | length 1390.7
  L1-Top w5: MC2.133@3769.69,3251.58 3769.69,3294.69 v1(3770,3295) ; v1(3789,3316) 3789.37,3315.63 MC2.135@3789.37,3251.58
  L1-Top w16: v1(3770,3295) 3789,3314 v1(3789,3316)
  L1-Top w30: v1(3789,3316) 4055.68,3582.68 TP5.1@4448.82,3582.68 4547.24,3582.68 J2E.13@4763.78,3799.21 J2E.15@4842.52,3799.21
+1.8VDD: J2E.9 J2E.11 J21.2 MC2.129 MC2.131 MC2.178 TP4.1 | length 4633.2
  L1-Top w12: v1(3730,3295) 3730.31,3294.69 MC2.129@3730.31,3251.58 ; MC2.131@3750,3251.58 v1(3750,3316) ; MC2.178@4202.76,3008.27 4202.76,2945.24 v1(4203,2945)
  L4-Bottom w16: J21.2@295.28,2775.59 295.28,2539.37 TP4.1@433.07,2401.57 701.5,2670 3989,2670 4203,2884 v1(4203,2945)
+3.3VDD: C1.2 C15.1 J2.15 J2.16 J2E.1 J2E.3 J2E.5 J2E.7 J3.15 J3.16 MC2.121 MC2.123 MC2.125 MC2.127 MC2.174 R1.2 R2.2 R3.2 R4.2 R5.2 R8.1 R9.1 R10.1 R11.1 R12.1 R22.1 R24.1 R26.1 TP3.1 U3.1 U3.6 U5.8 | length 1341.7
  L1-Top w8: v1(2203,1194) R5.2@2203,1227.38 ; v1(2255,1194) R4.2@2255,1227.38 ; v1(2359,1194) R3.2@2359,1227.38 ; v1(2411,1194) R2.2@2411,1227.38 ; v1(2463,1194) R1.2@2463,1227.38 ; v1(2992,1194) R12.1@2992,1227.38 ; v1(3044,1194) R11.1@3044,1227.38 ; v1(3148,1194) R10.1@3148,1227.38 ; v1(3200,1194) R9.1@3200,1227.38 ; v1(3252,1194) R8.1@3252,1227.38 ; MC2.121@3651.57,3251.58 3651.57,3294.57 v1(3652,3295) ; MC2.123@3671.26,3251.58 3671.26,3331.26 v1(3672,3332) ; MC2.125@3690.94,3251.58 3690.94,3294.94 v1(3691,3295) ; MC2.127@3710.63,3251.58 3710.63,3331.63 v1(3711,3332) ; v1(4163,2945) 4163.39,2945.39 MC2.174@4163.39,3008.27 ; U3.6@4917.28,2125.62 U3.6@4917.61,2125.95 U3.1@5065.25,2125.95 ; v1(5538,2455) 5538.19,2454.81 J2.15@5538.19,2401.57 ; J2.16@5569.69,2401.57 5569.69,2454.69 v1(5570,2455) ; v1(6286,2454) 6286.22,2453.78 J3.15@6286.22,2401.57 ; J3.16@6317.72,2401.57 6317.72,2453.72 v1(6318,2454)
  L1-Top w10: v1(4804,2114) 4820.38,2114 C1.2@4832,2125.62 U3.6@4917.28,2125.62 ; R22.1@4842.52,3330.71 4842.52,3362.52 v1(4843,3363) ; R24.1@4960.63,3330.71 4960.63,3362.63 v1(4961,3363) ; U5.8@5035.63,2929.13 5037.39,2927.38 C15.1@5122,2927.38 5140.38,2927.38 v1(5151,2938) ; R26.1@5078.74,3330.71 5078.74,3362.74 v1(5079,3363)
+5VDC: C14.1 J1.1 J2E.2 J2E.4 J2E.6 J2E.8 MC2.122 MC2.124 MC2.126 MC2.128 TP2.1 | length 369.7
  L1-Top w10: v1(3651,2944) 3651.57,2944.57 MC2.122@3651.57,3008.27 ; v1(3671,2965) 3671.26,2965.26 MC2.124@3671.26,3008.27 ; MC2.126@3690.94,3008.27 3690.94,2944.06 v1(3691,2944) ; v1(3710,2965) 3710.63,2965.63 MC2.128@3710.63,3008.27
  L1-Top w48: J1.1@362.2,708.66 515.43,708.66 C14.1@516,708.09
ADC_VN_X: J2E.19 MC2.149 | length 1326.4
  L1-Top w10: MC2.149@3927.17,3251.58 3927.17,3297.17 4033,3403 4603.79,3403 J2E.19@5000,3799.21
ADC_VP_X: J2E.17 MC2.147 | length 1278.9
  L1-Top w10: MC2.147@3907.48,3251.58 3907.48,3316.93 4022.55,3432 4554.05,3432 J2E.17@4921.26,3799.21
DGND: C1.1 C14.2 C15.2 J1.2 J1B.1 J1B.2 J1B.3 J1B.4 J1B.5 J1B.6 J1B.7 J1B.8 J1B.17 J1B.18 J1D.1 J1D.2 J1D.3 J1D.4 J1D.5 J1D.6 J1D.7 J1D.8 J1D.17 J2.1 J2.9 J2.10 J2.11 J2.14 J2.17 J2.20 J2B.1 J2B.2 J2B.3 J2B.4 J2B.5 J2B.6 J2B.17 J2B.18 J2D.1 J2D.2 J2D.3 J2D.4 J2D.5 J2D.6 J2D.7 J2D.8 J2D.9 J2D.17 J2E.18 J2E.20 J3.1 J3.9 J3.10 J3.11 J3.14 J3.17 J3.20 J4.2 J5.2 J6.2 J7.2 J8.2 J9.2 J10.2 J11.2 J12.2 J13.2 J14.2 J15.2 J16.1 J16.4 J16.7 J17.1 J17.4 J17.7 J18.1 J18.4 J18.7 J19.2 J20.2 J21.1 J21.3 J21.5 J21.7 J21.9 J21.11 J21.13 MC1.0 MC1.5 MC1.6 MC1.11 MC1.12 MC1.17 MC1.18 MC1.23 MC1.24 MC1.53 MC1.54 MC1.65 MC1.66 MC1.71 MC1.72 MC1.77 MC1.78 MC1.83 MC1.84 MC1.113 MC1.125 MC1.126 MC1.131 MC1.132 MC1.137 MC1.138 MC1.143 MC1.144 MC1.149 MC1.150 MC1.155 MC1.156 MC1.161 MC1.162 MC1.167 MC1.168 MC1.173 MC1.174 MC1.175 MC1.176 MC1.177 MC1.178 MC1.179 MC1.180 MC2.0 MC2.5 MC2.6 MC2.11 MC2.12 MC2.17 MC2.18 MC2.53 MC2.54 MC2.65 MC2.66 MC2.71 MC2.72 MC2.77 MC2.78 MC2.83 MC2.84 MC2.89 MC2.113 R6.2 R7.2 R13.2 R14.2 R23.2 R25.2 R27.2 R28.1 TP11.1 TP12.1 TP13.1 TP14.1 U3.3 U5.4 U5.7 | length 11343.3
  L1-Top w8: v1(469,593) 469.91,593.91 C14.2@516,593.91 ; v1(516,556) C14.2@516,593.91 ; v1(563,594) 562.91,593.91 C14.2@516,593.91 ; MC1.126@3690.95,724.8 3690.95,765.95 v1(3691,766) ; MC1.125@3690.95,968.11 3690.95,1032.95 v1(3691,1033) ; MC1.132@3750,724.8 v1(3750,766) ; MC1.131@3750,968.11 v1(3750,1033) ; v1(3809,766) 3809.06,765.94 MC1.138@3809.06,724.8 ; v1(3809,926) v1(3809,926) MC1.137@3809.06,968.11 ; v1(3868,661) 3868.11,661.11 MC1.144@3868.11,724.8 ; v1(3868,926) 3868,968.11 MC1.143@3868.11,968.11 ; v1(3926.89,683) 3927.17,683.28 MC1.150@3927.17,724.8 ; v1(3927,1033) 3927.17,1032.83 MC1.149@3927.17,968.11 ; v1(3985.89,683) 3986.22,683.33 MC1.156@3986.22,724.8 ; v1(3986,1012) 3986.22,1011.78 MC1.155@3986.22,968.11 ; v1(4044.89,683) ccw(c4043.96,683.93) 4045.28,683.93 MC1.162@4045.28,724.8 ; v1(4045,1012) 4045.28,1011.72 MC1.161@4045.28,968.11 ; v1(4104,1012) 4104.33,1011.67 MC1.167@4104.33,968.11 ; MC1.168@4104.33,724.8 4104.33,684.35 ccw(c4106.24,684.35) v1(4104.89,683) ; v1(4163,683) ccw(c4162.07,683.93) 4163.39,683.93 MC1.174@4163.39,724.8 ; v1(4163,1012) 4163.39,1011.61 MC1.173@4163.39,968.11 ; v1(4183,661) v1(4183,661) MC1.176@4183.07,724.8 ; v1(4183,1033) 4183.07,1032.93 MC1.175@4183.07,968.11 ; MC1.178@4202.76,724.8 4202.76,683.24 v1(4203,683) ; MC1.177@4202.76,968.11 4202.76,1011.76 v1(4203,1012) ; MC1.180@4222.44,724.8 4222.44,662.35 ccw(c4224.35,662.35) v1(4223,661) ; MC1.179@4222.44,968.11 4222.44,1032.44 v1(4223,1033)
  L1-Top w10: v1(1964.89,847) 2029.18,847 MC1.0@2029.72,846.46 2030.18,846 v1(2095.89,846) ; v1(1965,3131) 1966.08,3129.92 MC2.0@2029.72,3129.92 2095.92,3129.92 v1(2096,3130) ; v1(2115.89,681) 2116.14,681.25 MC1.6@2116.14,724.8 ; v1(2115.89,1012) 2116.14,1011.75 MC1.5@2116.14,968.11 ; v1(2116,2964) 2116.14,2964.14 MC2.6@2116.14,3008.27 ; v1(2116,3295) 2116.14,3294.86 MC2.5@2116.14,3251.58 ; v1(2129.89,846) 2236.75,846 MC1.0@2237.21,846.46 2237.75,847 v1(2344.89,847) ; v1(2130,3130) 2237.13,3130 2238.13,3131 v1(2345,3131) ; v1(2174.89,681) 2175.2,681.31 MC1.12@2175.2,724.8 ; v1(2174.89,1033) 2175.2,1032.69 MC1.11@2175.2,968.11 ; v1(2175,2944) 2175.2,2944.2 MC2.12@2175.2,3008.27 ; v1(2175,3295) 2175.2,3294.8 MC2.11@2175.2,3251.58 ; v1(2233.89,681) 2234.25,681.36 MC1.18@2234.25,724.8 ; v1(2233.89,1012) 2234.25,1011.64 MC1.17@2234.25,968.11 ; v1(2234,2964) 2234.25,2964.25 MC2.18@2234.25,3008.27 ; v1(2234,3295) 2234.25,3294.75 MC2.17@2234.25,3251.58 ; v1(2292.89,681) 2293.31,681.42 MC1.24@2293.31,724.8 ; MC1.23@2293.31,968.11 2293.31,1032.42 v1(2293.89,1033) ; v1(2307,1194) R7.2@2307,1227.38 ; v1(2379.89,847) 2486.66,847 MC1.0@2487.21,846.46 2487.66,846 v1(2594.89,846) ; v1(2380,3131) 2486.13,3131 2487.13,3130 2487.2,3130 v1(2595,3130) ; v1(2515,1194) R6.2@2515,1227.38 ; v1(2588,2964) 2588.58,2964.58 MC2.54@2588.58,3008.27 ; v1(2588,3295) 2588.58,3294.42 MC2.53@2588.58,3251.58 ; MC1.54@2588.58,724.8 2588.58,681.31 v1(2588.89,681) ; MC1.53@2588.58,968.11 2588.58,1011.69 v1(2588.89,1012) ; v1(2629.89,846) 2694.23,846 MC1.0@2694.69,846.46 2695.14,846 v1(2755.89,846) 2816.67,846 MC1.0@2817.13,846.46 2817.67,847 v1(2881.89,847) ; v1(2630,3130) 2694.69,3130 v1(2756,3130) 2817.05,3130 2818.05,3131 v1(2882,3131) ; v1(2902.89,681) 2903.54,681.65 MC1.66@2903.54,724.8 ; MC1.65@2903.54,968.11 2903.54,1011.65 v1(2903.89,1012) ; MC2.66@2903.54,3008.27 2903.54,2965.46 v1(2904,2965) ; MC2.65@2903.54,3251.58 2903.54,3294.54 v1(2904,3295) ; v1(2916.89,847) 3024.06,847 MC1.0@3024.61,846.46 3025.15,847 v1(3132.89,847) ; v1(2917,3131) 3023.53,3131 3024.53,3130 3024.61,3130 v1(3133,3130) ; v1(2961.89,1033) 2962.6,1032.29 MC1.71@2962.6,968.11 ; v1(2962,2944) 2962.6,2944.6 MC2.72@2962.6,3008.27 ; v1(2962,3295) 2962.6,3294.4 MC2.71@2962.6,3251.58 ; MC1.72@2962.6,724.8 2962.6,681.4 v1(2963,681) ; v1(3021,3295) 3021.65,3294.35 MC2.77@3021.65,3251.58 ; MC1.78@3021.65,724.8 3021.65,681.35 v1(3022,681) ; MC1.77@3021.65,968.11 3021.65,1011.76 v1(3021.89,1012) ; MC2.78@3021.65,3008.27 3021.65,2965.35 v1(3022,2965) ; v1(3080,3295) 3080.71,3294.29 MC2.83@3080.71,3251.58 ; MC1.84@3080.71,724.8 3080.71,681.29 v1(3081,681) ; MC1.83@3080.71,968.11 3080.71,1032.82 v1(3080.89,1033) ; MC2.84@3080.71,3008.27 3080.71,2944.29 v1(3081,2944) ; v1(3096,1194) R14.2@3096,1227.38 ; MC2.89@3139.76,3251.58 3139.76,3294.76 v1(3140,3295) ; v1(3165,3130) 3274.61,3130 v1(3382,3130) ; v1(3168,847) 3274.06,847 MC1.0@3274.61,846.46 3275.06,846 v1(3381.89,846) ; v1(3304,1194) R13.2@3304,1227.38 ; v1(3375.89,1012) 3375.98,1011.9 MC1.113@3375.98,968.11 ; MC2.113@3375.98,3251.58 v1(3376,3295) ; v1(3416.89,846) 3481.63,846 MC1.0@3482.09,846.46 3482.54,846 v1(3542.89,846) 3604.07,846 MC1.0@3604.53,846.46 3604.99,846 v1(3668.89,846) ; v1(3417,3130) 3482.01,3130 MC2.0@3482.09,3129.92 3482.16,3130 v1(3543,3130) 3604.45,3130 MC2.0@3604.53,3129.92 3604.61,3130 v1(3669,3130) ; v1(3704.89,846) 3811.55,846 MC1.0@3812.01,846.46 3812.47,846 v1(3918.89,846) ; v1(3705,3130) 3811.93,3130 MC2.0@3812.01,3129.92 3812.09,3130 v1(3919,3130) ; v1(3954.89,846) 4061.55,846 MC1.0@4062.01,846.46 4062.47,846 v1(4168.89,846) ; v1(3955,3130) 4061.93,3130 MC2.0@4062.01,3129.92 4062.09,3130 v1(4169,3130) ; v1(4204.89,846) 4269.03,846 MC1.0@4269.49,846.46 4270.03,847 v1(4333.89,847) ; v1(4205,3130) 4269.41,3130 MC2.0@4269.49,3129.92 4269.57,3130 v1(4336,3130) ; v1(4580,279) 4580.12,278.88 J16.7@4580.12,218.5 ; v1(4730,279) 4730.12,278.88 J16.4@4730.12,218.5 ; v1(4804,2090) 4820.38,2090 C1.1@4832,2078.38 ; J16.1@4880.12,218.5 4880.12,278.12 v1(4881,279) ; U5.7@4985.63,2929.13 4986,2928.76 v1(4986,2871) ; U3.3@5065.25,2325.95 5108.95,2325.95 v1(5109,2326) ; v1(5367,279) 5367.52,278.48 J17.7@5367.52,218.5 ; v1(5396,2777) 5396.46,2776.54 J2.10@5396.46,2724.41 ; v1(5412,2455) 5412.2,2454.8 J2.11@5412.2,2401.57 ; J2.9@5427.95,2724.41 5427.95,2776.95 v1(5428,2777) ; J2.14@5506.69,2401.57 5506.69,2454.69 v1(5507,2455) ; v1(5517,279) 5517.52,278.48 J17.4@5517.52,218.5 ; v1(5601,2455) 5601.18,2454.82 J2.17@5601.18,2401.57 ; J17.1@5667.52,218.5 5667.52,278.52 v1(5668,279) ; J2.1@5679.92,2724.41 5679.92,2776.92 v1(5680,2777) ; J2.20@5695.67,2401.57 5695.67,2454.67 v1(5696,2455) ; v1(6144,2777) 6144.49,2776.51 J3.10@6144.49,2724.41 ; J18.7@6154.92,218.5 6154.92,278.92 v1(6155,279) ; v1(6160,2454) 6160.24,2453.76 J3.11@6160.24,2401.57 ; J3.9@6175.98,2724.41 v1(6176,2777) ; J3.14@6254.72,2401.57 6254.72,2453.72 v1(6255,2454) ; J18.4@6304.92,218.5 6304.92,278.92 v1(6305,279) ; v1(6349,2454) 6349.21,2453.79 J3.17@6349.21,2401.57 ; J3.1@6427.95,2724.41 6427.95,2776.95 v1(6428,2777) ; J3.20@6443.7,2401.57 6443.7,2453.7 v1(6444,2454) ; J18.1@6454.92,218.5 6454.92,277.92 v1(6456,279) ; v1(6778,650) 6778.39,649.61 J13.2@6812.01,649.61 ; v1(6778,964) 6778.57,964.57 J12.2@6812.01,964.57 ; v1(6778,2224) 6778.41,2224.41 J9.2@6812.01,2224.41 ; v1(6778,2539) 6778.37,2539.37 J8.2@6812.01,2539.37 ; v1(6778,3012) 6778.19,3011.81 J11.2@6812.01,3011.81 ; v1(6778,3317) 6811.94,3317 J10.2@6812.01,3316.93 ; v1(6778,1437) J15.2@6812.01,1437.01 ; v1@6778.03,1751.97 J14.2@6812.01,1751.97 ; v1(6811,907) 6812.01,908.01 J12.2@6812.01,964.57 ; v1(6811,1022) 6812.01,1020.99 J12.2@6812.01,964.57 ; v1(6811,1380) 6812.01,1381.01 J15.2@6812.01,1437.01 ; v1(6811,1695) 6812.01,1696.01 J14.2@6812.01,1751.97 ; v1(6812,3260) J10.2@6812.01,3316.93 ; v1(6812,3374) J10.2@6812.01,3316.93 ; v1(6812,592) J13.2@6812.01,649.61 ; v1(6812,1494) J15.2@6812.01,1437.01 ; v1(6812,2167) J9.2@6812.01,2224.41 ; v1(6812,2282) J9.2@6812.01,2224.41 ; v1(6812,2482) J8.2@6812.01,2539.37 ; v1(6812,2597) J8.2@6812.01,2539.37 ; v1(6812,2954) J11.2@6812.01,3011.81 ; v1(6812,3069) J11.2@6812.01,3011.81 ; v1(6813,706) 6812.01,705.01 J13.2@6812.01,649.61 ; v1(6813,1809) 6812.01,1808.01 J14.2@6812.01,1751.97 ; v1(6927,2954) 6928.15,2955.15 J11.2@6928.15,3011.81 ; v1(6928,592) 6928.15,592.15 J13.2@6928.15,649.61 ; v1(6928,907) 6928.15,907.15 J12.2@6928.15,964.57 ; v1(6928,1022) 6928.15,1021.85 J12.2@6928.15,964.57 ; v1(6928,1380) 6928.15,1380.15 J15.2@6928.15,1437.01 ; v1(6928,1809) 6928.15,1808.85 J14.2@6928.15,1751.97 ; v1(6929,707) 6928.15,706.15 J13.2@6928.15,649.61 ; v1(6929,1494) 6928.15,1493.15 J15.2@6928.15,1437.01 ; v1(6929,1695) 6928.15,1695.85 J14.2@6928.15,1751.97 ; v1(6929,2167) 6928.15,2167.85 J9.2@6928.15,2224.41 ; v1(6929,2282) 6928.15,2281.15 J9.2@6928.15,2224.41 ; v1(6929,2482) 6928.15,2482.85 J8.2@6928.15,2539.37 ; v1(6929,2597) 6928.15,2596.15 J8.2@6928.15,2539.37 ; v1(6929,3260) 6929,3316.08 J10.2@6928.15,3316.93 6929,3317.78 v1(6929,3374) ; v1(6930,3069) 6928.15,3067.15 J11.2@6928.15,3011.81 ; v1(6962,650) 6961.61,649.61 J13.2@6928.15,649.61 ; v1(6962,964) 6961.43,964.57 J12.2@6928.15,964.57 ; v1(6962,1437) J15.2@6928.15,1437.01 ; v1@6961.97,1751.97 J14.2@6928.15,1751.97 ; v1(6962,2224) 6961.59,2224.41 J9.2@6928.15,2224.41 ; v1(6962,2539) 6961.63,2539.37 J8.2@6928.15,2539.37 ; v1(6962,3012) 6961.81,3011.81 J11.2@6928.15,3011.81
  L1-Top w12: v1(4795,3058) R28.1@4795,3093.07 ; v1(4885,3192) 4885.63,3191.37 U5.4@4885.63,3133.86 ; R23.2@4901.57,3330.71 4901.57,3362.57 v1(4902,3363) ; R25.2@5019.69,3330.71 5019.69,3362.69 v1(5020,3363) ; C15.2@5122,2974.62 5140.38,2974.62 v1(5151,2964) ; R27.2@5137.8,3330.71 5137.8,3362.8 v1(5138,3363)
  other v1: 5118.11,314.96 5275.59,314.96 5748.03,314.96 5905.51,314.96 6062.99,314.96 6535.43,314.96 6062.99,433.07 4960.63,472.44 5118.11,472.44 5748.03,472.44 5905.51,472.44 6535.43,472.44 4803.15,629.92 4960.63,629.92 5118.11,629.92 5275.59,629.92 5433.07,629.92 5590.55,629.92 5748.03,629.92 5905.51,629.92 6062.99,629.92 6220.47,629.92 6377.95,629.92 4291.34,1102.36 4409.45,1220.47 4527.56,1338.58 4645.67,1456.69 3740.16,1496.06 3976.38,1496.06 4763.78,1574.8 3858.27,1614.17 4094.49,1614.17 4881.89,1692.91 3976.38,1732.28 4212.6,1732.28 6778,1752 6962,1752 4094.49,1850.39 4330.71,1850.39 5629.92,2007.87 5787.4,2007.87 6062.99,2007.87 4370.08,2125.98 6181.1,2125.98 4645.67,2165.35 4488.19,2244.09
EEPROM_A0: R26.2 R27.1 U5.1 | length 226.5
  L1-Top w8: U5.1@5035.63,3133.86 5035.63,3202.63 5078.74,3245.74 R26.2@5078.74,3283.46 R27.1@5137.8,3283.46
EEPROM_A1: R24.2 R25.1 U5.2 | length 222.8
  L1-Top w8: R24.2@4960.63,3283.46 R25.1@5019.69,3283.46 5019.69,3252.69 4985.63,3218.63 U5.2@4985.63,3133.86
EEPROM_A2: R22.2 R23.1 U5.3 | length 222.8
  L1-Top w8: R22.2@4842.52,3283.46 R23.1@4901.57,3283.46 4901.57,3251.43 4935.63,3217.37 U5.3@4935.63,3133.86
FX3_SCL: J2E.14 MC2.172 U5.6 | length 2089.6
  L1-Top w10: MC2.172@4143.7,3008.27 4143.7,2936.43 4154.13,2926 4751,2926 4821,2996 4917,2996 4935.63,2977.37 U5.6@4935.63,2929.13 4935.63,2871.37 v1(4936,2871)
  L4-Bottom w10: J2E.14@4763.78,3877.95 4804,3837.73 4804,3463 4873,3394 4873,3239 4936,3176 v1(4936,2871)
FX3_SDA: J2E.12 MC2.170 U5.5 | length 2017.1
  L1-Top w10: MC2.170@4124.02,3008.27 4124.02,2920.98 4174,2871 v1(4885,2871) 4885.63,2871.63 U5.5@4885.63,2929.13
  L4-Bottom w10: J2E.12@4685.04,3877.95 4724,3838.99 4724,3425 4858,3291 4858,3162 4885,3135 v1(4885,2871)
GTX115_REFCLK0N: MC1.147 R16.1 U3.5 | length 1911.8
  L1-Top w5.24: MC1.147@3907.48,968.11 3907.48,989.01 ccw(c3899.01,989.01) 3905,995 cw(c3909.83,999.83) 3903,999.83 3903,1455.58 cw(c4003,1455.58) 3932.29,1526.29 4646.2,2240.2 cw(c4724.85,2161.56) 4724.85,2272.78 cw(c4724.85,2258.63) 4739,2258.63 4739,2256 ccw(c4749,2256) 4749,2246 4750,2246 ccw(c4750,2253.24) 4755.12,2248.12 4762.88,2255.88 cw(c4768,2250.76) 4768,2258 cw(c4768,2251.88) 4772.33,2256.21 R16.1@4786,2242.54 4808.09,2264.63 cw(c4822,2250.72) 4822,2270.39 4862,2270.39 cw(c4862,2243.41) 4881.08,2262.49 U3.5@4917.61,2225.95
GTX115_REFCLK0P: MC1.145 R16.2 U3.4 | length 1912.9
  L1-Top w5.24: MC1.145@3887.8,968.11 3887.8,988.68 cw(c3895.32,988.68) 3890,994 ccw(c3885.7,998.3) 3891.78,998.3 3891.78,1455.58 cw(c4003,1455.58) 3924.36,1534.22 4644.84,2254.71 cw(c4715.55,2184) 4715.55,2284 4751,2284 ccw(c4751,2307.02) 4767.27,2290.74 R16.2@4786,2309.46 4808.09,2287.37 ccw(c4822,2301.28) 4822,2281.61 4862,2281.61 ccw(c4862,2308.82) 4881.24,2289.58 U3.4@4917.61,2325.95
GTX115_RXN0: C31.2 MC1.171 | length 3135
  L1-Top w5.24: MC1.171@4143.7,968.11 4143.7,986.06 ccw(c4131.06,986.06) 4140,995 cw(c4142.41,997.41) 4139,997.41 4139,1022.58 cw(c4239,1022.58) 4168.29,1093.29 4830.71,1755.71 cw(c4901.42,1685) 4901.42,1785 6467.71,1785 cw(c6467.71,1685) 6538.42,1755.71 6675.89,1618.25 ccw(c6754,1696.36) 6754,1585.89 cw(c6754,1579.89) 6760,1579.89 6760,1575 ccw(c6765,1575) 6765,1570 6766,1570 ccw(c6766,1574) 6770,1574 cw(c6775,1574) 6775,1579 6783,1579 cw(c6783,1570) C31.2@6792,1570
GTX115_RXN1: C27.2 MC1.165 | length 4205.5
  L1-Top w5.24: MC1.165@4084.65,968.11 4084.65,986.2 ccw(c4072.2,986.2) 4081,995 cw(c4083.41,997.41) 4080,997.41 4080,1060.58 cw(c4180,1060.58) 4109.29,1131.29 4797.71,1819.71 cw(c4868.42,1749) 4868.42,1849 6231.8,1849 ccw(c6231.8,1960.22) 6310.39,1881.52 ccw(c6231.8,1960.22) 6310.44,1881.58 6647.64,2218.78 ccw(c6569,2297.42) 6647.7,2218.83 ccw(c6569,2297.42) 6680.22,2297.42 6680.22,3086.63 cw(c6758.72,3086.63) 6703.21,3142.13 cw(c6740.97,3104.37) 6740.97,3157.78 6745.22,3157.78 cw(c6745.22,3150) 6753,3150 6753,3147 ccw(c6760,3147) 6760,3140 6762,3140 ccw(c6762,3146) 6768,3146 cw(c6773,3146) 6773,3151 6782.07,3151 cw(c6782.07,3141.73) C27.2@6791.34,3141.73
GTX115_RXN2: J3.13 MC1.159 | length 2949.4
  L1-Top w5.24: MC1.159@4025.59,968.11 4025.59,985.33 ccw(c4013.33,985.33) 4022,994 cw(c4024.41,996.41) 4021,996.41 4021,1083.58 cw(c4121,1083.58) 4050.29,1154.29 4785.71,1889.71 cw(c4856.42,1819) 4856.42,1919 5827.8,1919 ccw(c5827.8,2030.22) 5906.39,1951.52 ccw(c5827.8,2030.22) 5906.44,1951.58 6193.45,2238.58 ccw(c6146.03,2286) 6213.09,2286 6213.09,2359.59 cw(c6219.14,2359.59) 6214.86,2363.86 6215,2364 ccw(c6195.13,2383.87) 6223.23,2383.87 J3.13@6223.23,2401.57
GTX115_RXN3: J2.13 MC1.153 | length 2285.4
  L1-Top w5.24: MC1.153@3966.54,968.11 3966.54,986.46 ccw(c3954.46,986.46) 3963,995 cw(c3965.41,997.41) 3962,997.41 3962,1123.58 cw(c4062,1123.58) 3991.29,1194.29 4763.71,1966.71 cw(c4834.42,1896) 4834.42,1996 5162.8,1996 ccw(c5162.8,2107.22) 5241.39,2028.52 ccw(c5162.8,2107.22) 5241.44,2028.58 5432.48,2219.62 ccw(c5353.84,2298.26) 5465.06,2298.26 5465.06,2356.9 cw(c5475.1,2356.9) 5468,2364 ccw(c5450.63,2381.37) 5475.2,2381.37 J2.13@5475.2,2401.57
GTX115_RXP0: C30.2 MC1.169 | length 3135.6
  L1-Top w5.24: MC1.169@4124.02,968.11 4124.02,986.8 cw(c4134.2,986.8) 4127,994 ccw(c4125.12,995.88) 4127.78,995.88 4127.78,1022.58 cw(c4239,1022.58) 4160.36,1101.22 4822.78,1763.64 cw(c4901.42,1685) 4901.42,1796.22 6467.71,1796.22 cw(c6467.71,1685) 6546.36,1763.64 6683.82,1626.18 ccw(c6754,1696.36) 6754,1597.11 6757.34,1597.11 ccw(c6757.34,1642.42) 6789.38,1610.38 C30.2@6792,1613
GTX115_RXP1: C26.2 MC1.163 | length 4204.7
  L1-Top w5.24: MC1.163@4064.96,968.11 4064.96,986.66 cw(c4075.34,986.66) 4068,994 ccw(c4066.12,995.88) 4068.78,995.88 4068.78,1060.58 cw(c4180,1060.58) 4101.36,1139.22 4789.78,1827.64 cw(c4868.42,1749) 4868.42,1860.22 6231.8,1860.22 ccw(c6231.8,1960.22) 6302.51,1889.51 6639.71,2226.71 ccw(c6569,2297.42) 6669,2297.42 6669,3086.63 cw(c6758.72,3086.63) 6695.28,3150.07 6696.29,3151.08 cw(c6739.54,3107.84) 6739.54,3169 6756.31,3169 ccw(c6756.31,3214.83) 6788.72,3182.42 C26.2@6791.34,3185.04
GTX115_RXP2: J3.12 MC1.157 | length 2949.4
  L1-Top w5.24: MC1.157@4005.91,968.11 4005.91,986.53 cw(c4016.47,986.53) 4009,994 ccw(c4007.12,995.88) 4009.78,995.88 4009.78,1083.58 cw(c4121,1083.58) 4042.36,1162.22 4777.78,1897.64 cw(c4856.42,1819) 4856.42,1930.22 5827.8,1930.22 ccw(c5827.8,2030.22) 5898.51,1959.51 6185.51,2246.51 ccw(c6146.03,2286) 6201.87,2286 6201.87,2359.59 ccw(c6195.73,2359.59) 6200.08,2363.92 6199,2365 cw(c6216.55,2382.55) 6191.73,2382.55 J3.12@6191.73,2401.57
GTX115_RXP3: J2.12 MC1.151 | length 2285.2
  L1-Top w5.24: MC1.151@3946.85,968.11 3946.85,986.4 cw(c3957.6,986.4) 3950,994 ccw(c3948.12,995.88) 3950.78,995.88 3950.78,1123.58 cw(c4062,1123.58) 3983.36,1202.22 4755.78,1974.64 cw(c4834.42,1896) 4834.42,2007.22 5162.8,2007.22 ccw(c5162.8,2107.22) 5233.51,2036.51 5424.55,2227.55 ccw(c5353.84,2298.26) 5453.84,2298.26 5453.84,2357.15 ccw(c5444.15,2357.15) 5451,2364 cw(c5468.62,2381.62) 5443.7,2381.62 J2.12@5443.7,2401.57
GTX115_TXN0: C29.2 MC1.141 | length 3495
  L1-Top w5.24: MC1.141@3848.43,968.11 cw(c3856.7,976.38) 3845,976.38 3845,997.51 cw(c3865.49,997.51) v1(3851,1012) ; v1(6729,791) cw(c6744.43,775.57) 6744.43,797.39 6765,797.39 cw(c6765,779.02) 6777.98,792.02 6785.61,784.39 ccw(c6791.38,790.16) C29.2@6791.38,782
  L4-Bottom w5.24: v1(3851,1012) 3857.17,1012 ccw(c3857.17,1018.83) 3861.99,1013.99 ; 3862,1014 3862.59,1014.59 ccw(c3859.17,1018) 3864,1018 3864,1018.17 ccw(c3857.17,1018.17) 3862.01,1022.99 ; 3862,1023 3860.83,1024.17 ccw(c3854,1017.34) 3854,1027 cw(c3854,1031.83) 3850.59,1028.41 3848,1031 cw(c3855.24,1038.24) 3845,1038.24 3845,1042 cw(c3898.11,1042) 3860.55,1079.55 4039.71,1258.71 cw(c4110.42,1188) 4110.42,1288 6377.58,1288 cw(c6377.58,1188) 6448.29,1258.71 6549.49,1157.51 cw(c6478.78,1086.8) 6578.78,1086.8 6578.78,916.6 ccw(c6685.6,916.6) 6610.07,841.07 6621.17,829.97 ccw(c6699.81,908.61) 6699.81,797.39 6713.57,797.39 cw(c6713.57,775.57) v1(6729,791)